# EAGLE board Layout (EAGLE 9.1.3)
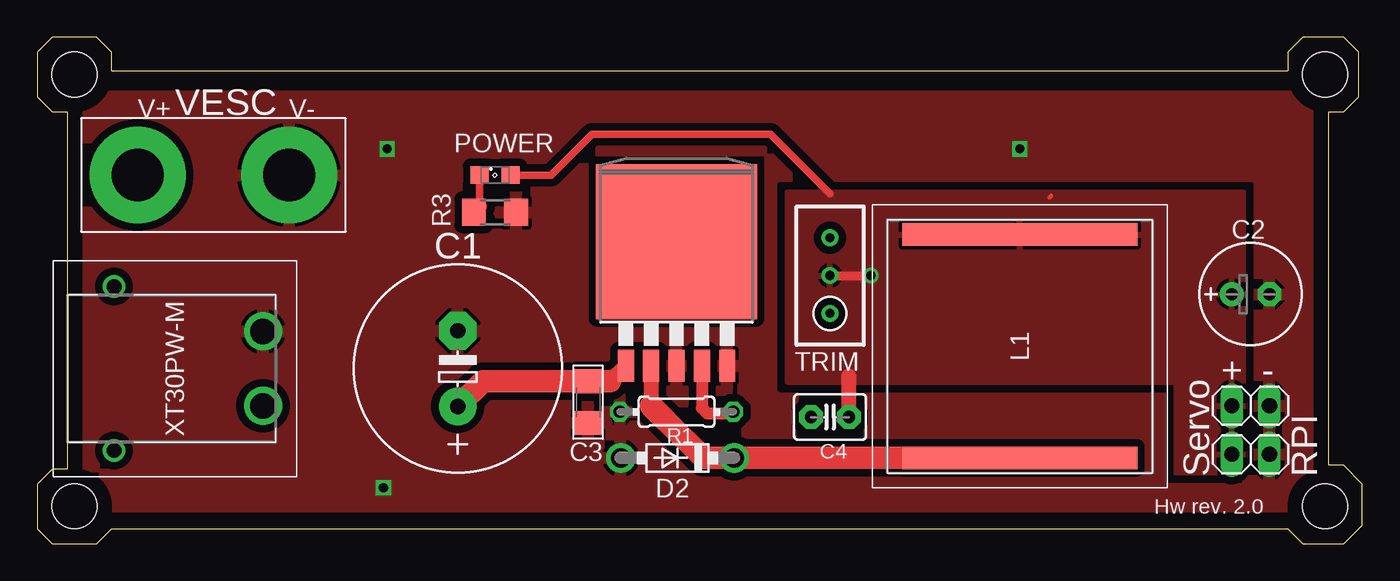
[diagram p0: board, top side]
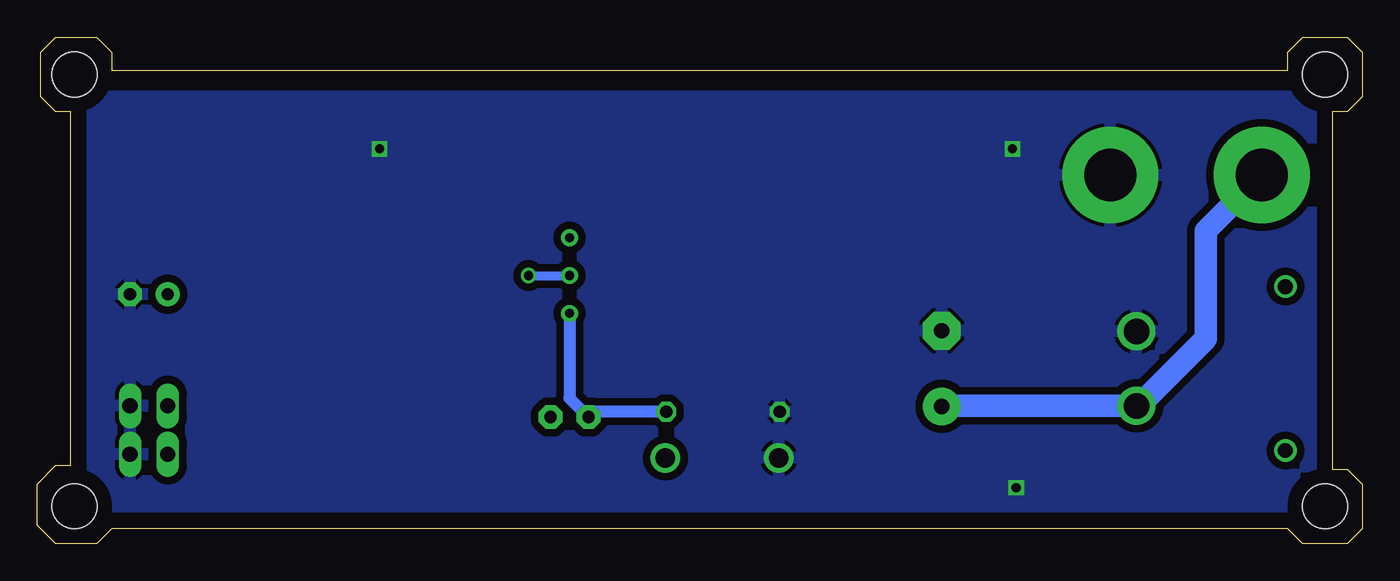
[diagram p1: board, bottom side, seen from below]

Size 89 x 34 mm. Coordinates in mm from the lower left corner, seen from the top.
Outline: 5,31.75 5,33 4,34 1,34 0,33 0,30 1,29 2,29 2,5 1,5 0,4 0,1 1,0 4,0 5,1 84,1 85,0 87.75,0 89,1.25 89,4 87.75,5.25 86.75,5.25 86.75,29 87.75,29 88.75,30 88.75,33 87.75,34 85,34 84,33 84,31.75 5,31.75
Copper layers (1*16): Top 0.035mm / dielectric 1.5mm / Bottom 0.035mm
Design rules "default *": minimum track width 10mil, minimum drill 24mil, track to track 20mil, track to pad 20mil, pad to pad 20mil, via to via 20mil, smd to smd 20mil, copper to edge 40mil, drill to drill 8mil, minimum pad ring 10mil, minimum via ring 8mil, stop-mask expansion 4mil, vias tented up to drill 0mil, thermal gap 10mil
Holes 3 mm at 2.5,31.5 86.5,31.5 86.5,2.5 2.5,2.5

## Footprints (pad centres in the part's own frame; a part is rotated, then mirrored left to right if it is on the bottom)
E5-13 = drill 1.016 pad 2.54: + -2.54,0 | drill 1.016 pad 2.54 octagon: - 2.54,0
E2,5-7 = drill 0.813 pad 1.6: + -1.27,0 | drill 0.813 pad 1.6 octagon: - 1.27,0
C1206 = smd 1.6 x 1.8: 1 -1.4,0; 2 1.4,0
C2.5-3 = drill 0.813 pad 1.6 octagon: 1 -1.27,0; 2 1.27,0
DO41-7.6 = drill 1.33 pad 1.93: A 3.81,0; C -3.81,0
TO263-5 = smd 1.067 x 2.159: 1 -3.404,-5.791; 2 -1.702,-5.791; 3 0,-5.791; 4 1.702,-5.791; 5 3.404,-5.791 | smd 10.8 x 10.41: 6 0,2.54
1X02 = drill 1.016 long: 1 -1.27,0; 2 1.27,0
P0846SNLT = smd 1.52 x 15.75: 1 -7.495,0; 2 7.495,0
SML0805 = smd 1.2 x 1.2: A 1.05,0; C -1.05,0
0204/7 = drill 0.813 octagon: 1 -3.81,0; 2 3.81,0
R1206 = smd 1.6 x 1.803: 1 -1.422,0; 2 1.422,0
RTRIM3296W = drill 0.61: 1 0,-2.54; 2 0,0; 3 0,2.54
VESC_LEADS = drill 3.5 pad 6.452: P$1 0,0; P$2 10.16,0
XT30PWM = drill 1.7 pad 2.55: 1 -2.5,-5.912; 2 2.5,-5.912 | drill 1 pad 1.5: 3 5.5,4.088; 4 -5.5,4.088

## Placement (x,y rotation side)
C1  [E5-13]  28.25,11.75 90 top
C2  [E2,5-7]  81.5,16.75 0 top
C3  [C1206]  37,9.5 270 top
C4  [C2.5-3]  53.25,8.5 0 top
D2  1N5821  [DO41-7.6]  43,5.75 180 top
IC1  LM2596S  [TO263-5]  42.94,17.74 0 top
JP1  [1X02]  81.5,6 0 top
JP2  [1X02]  81.5,9.25 0 top
L1  PE-54041SNL  [P0846SNLT]  66,13.25 90 top
POWER  [SML0805]  30.75,24.75 0 top
R1  [0204/7]  42.94,8.85 0 top
R3  [R1206]  30.75,22.25 180 top
TRIM  [RTRIM3296W]  53.25,18 0 top
U$1  VESC_LEADS  [VESC_LEADS]  6.75,24.75 0 top
XT30PW-M  XT30PW-M  [XT30PWM]  9.25,11.75 90 top

## Library data of the parts
C1 C2 = rcl; SPICEPREFIX: C
C3 R1 = rcl
C4 = capacitor-wima
D2 = _mod_diode
IC1 = national-semiconductor; MF: NATIONAL SEMICONDUCTOR; MPN: LM2596S-ADJ/NOPB; OC_FARNELL: 9494367; OC_NEWARK: 41K3842
JP1 JP2 = pinhead
L1 = PE-54041SNL; DESCRIPTION: Fixed Inductors SIMPLE SWITCHER IND; HEIGHT: 9mm; MANUFACTURER_NAME: Pulse; MANUFACTURER_PART_NUMBER: PE-54041SNL; MOUSER_PART_NUMBER: 673-PE-54041SNL; MOUSER_PRICE-STOCK: https://www.mouser.com/Search/Refine.aspx?Keyword=673-PE-54041SNL
POWER = led
R3 TRIM = resistor
U$1 = VESC_LEADS
XT30PW-M = XT30PW-M; DESCRIPTION: 30A Low Temperature Rise Fire Retardant Plug; HEIGHT: 5mm; MANUFACTURER_NAME: Amass; MANUFACTURER_PART_NUMBER: XT30PW-M

## Nets
GND: C1.- C2.- C3.2 D2.A IC1.3 IC1.5 JP1.2 JP2.2 R1.1 R3.1 U$1.P$2 XT30PW-M.2
IN: C1.+ C3.1 IC1.1 U$1.P$1 XT30PW-M.1
N$1: POWER.C R3.2
N$2: D2.C IC1.2 L1.1
N$3: C4.1 IC1.4 R1.2 TRIM.1
VCC: C2.+ C4.2 JP1.1 JP2.1 L1.2 POWER.A TRIM.2

## Tracks (layer width: path | path; a pad name or v marks a point on that pad's centre or on a via)
GND  (via drill 0.61)
  other vias: 23.25,3.75 23.5,26.5 66,26.5
  pour Top (rank 2): 2.5,30 2.5,2.5 85.5,2.5 85.5,30
  pour Bottom: 2.5,30 85.5,30 85.5,2.5 2.5,2.5
IN
  Top 1.016: IC1.1 38.49,10.9
  Top 1.5: C1.+ 29.94,10.9 C3.1 38.49,10.9
  Bottom 1.5: U$1.P$1 10.5,21 10.5,13.75 15,9.25 XT30PW-M.1 28.21,9.25 C1.+
N$1
  Top 0.508: 29.7,22.62 POWER.C
  Top 1.016: R3.2 29.7,22.62
N$2
  Top 0.813: D2.C 46.75,5.75
  Top 1.016: IC1.2 41.24,9.26
  Top 1.5: L1.1 46.75,5.75 44.74,5.75 42.25,8.25 41.24,9.26
N$3
  Top 0.813: IC1.4 44.64,9.11 45,8.75 46.65,8.75 R1.2
  Bottom 0.813: R1.2 51.63,8.85 C4.1 53.25,9.77 TRIM.1
VCC  (via drill 0.61)
  Top 0.254: 68.11,23.36 68,23.25
  Top 0.508: POWER.A 34.5,24.75 37.25,27.5 49.25,27.5 53.25,23.5
  Top 0.61: TRIM.2 v56,18
  Top 1.016: C4.2 54.52,11.23 54.5,11.25
  Bottom 0.61: v56,18 TRIM.2
  pour Top (isolate 0.254): 50.39,10.87 76.5,10.87 76.5,4.79 81.02,4.79 81.02,23.57 58.99,23.57 50.39,23.57

## Text on the board
tPlace: VESC | + | - | Servo | RPI | Hw rev. 2.0